# Altium PCB 如意硬件采集模块0831.PcbDoc (part 1 of 3)
Units mm, origin at the board's own origin, x right, y up, seen from the top; angles counter-clockwise.
Board outline 146 x 59 mm, 2 copper layers (Top Layer, Bottom Layer); 262 components, 188 nets, 705 pads, 120 vias.
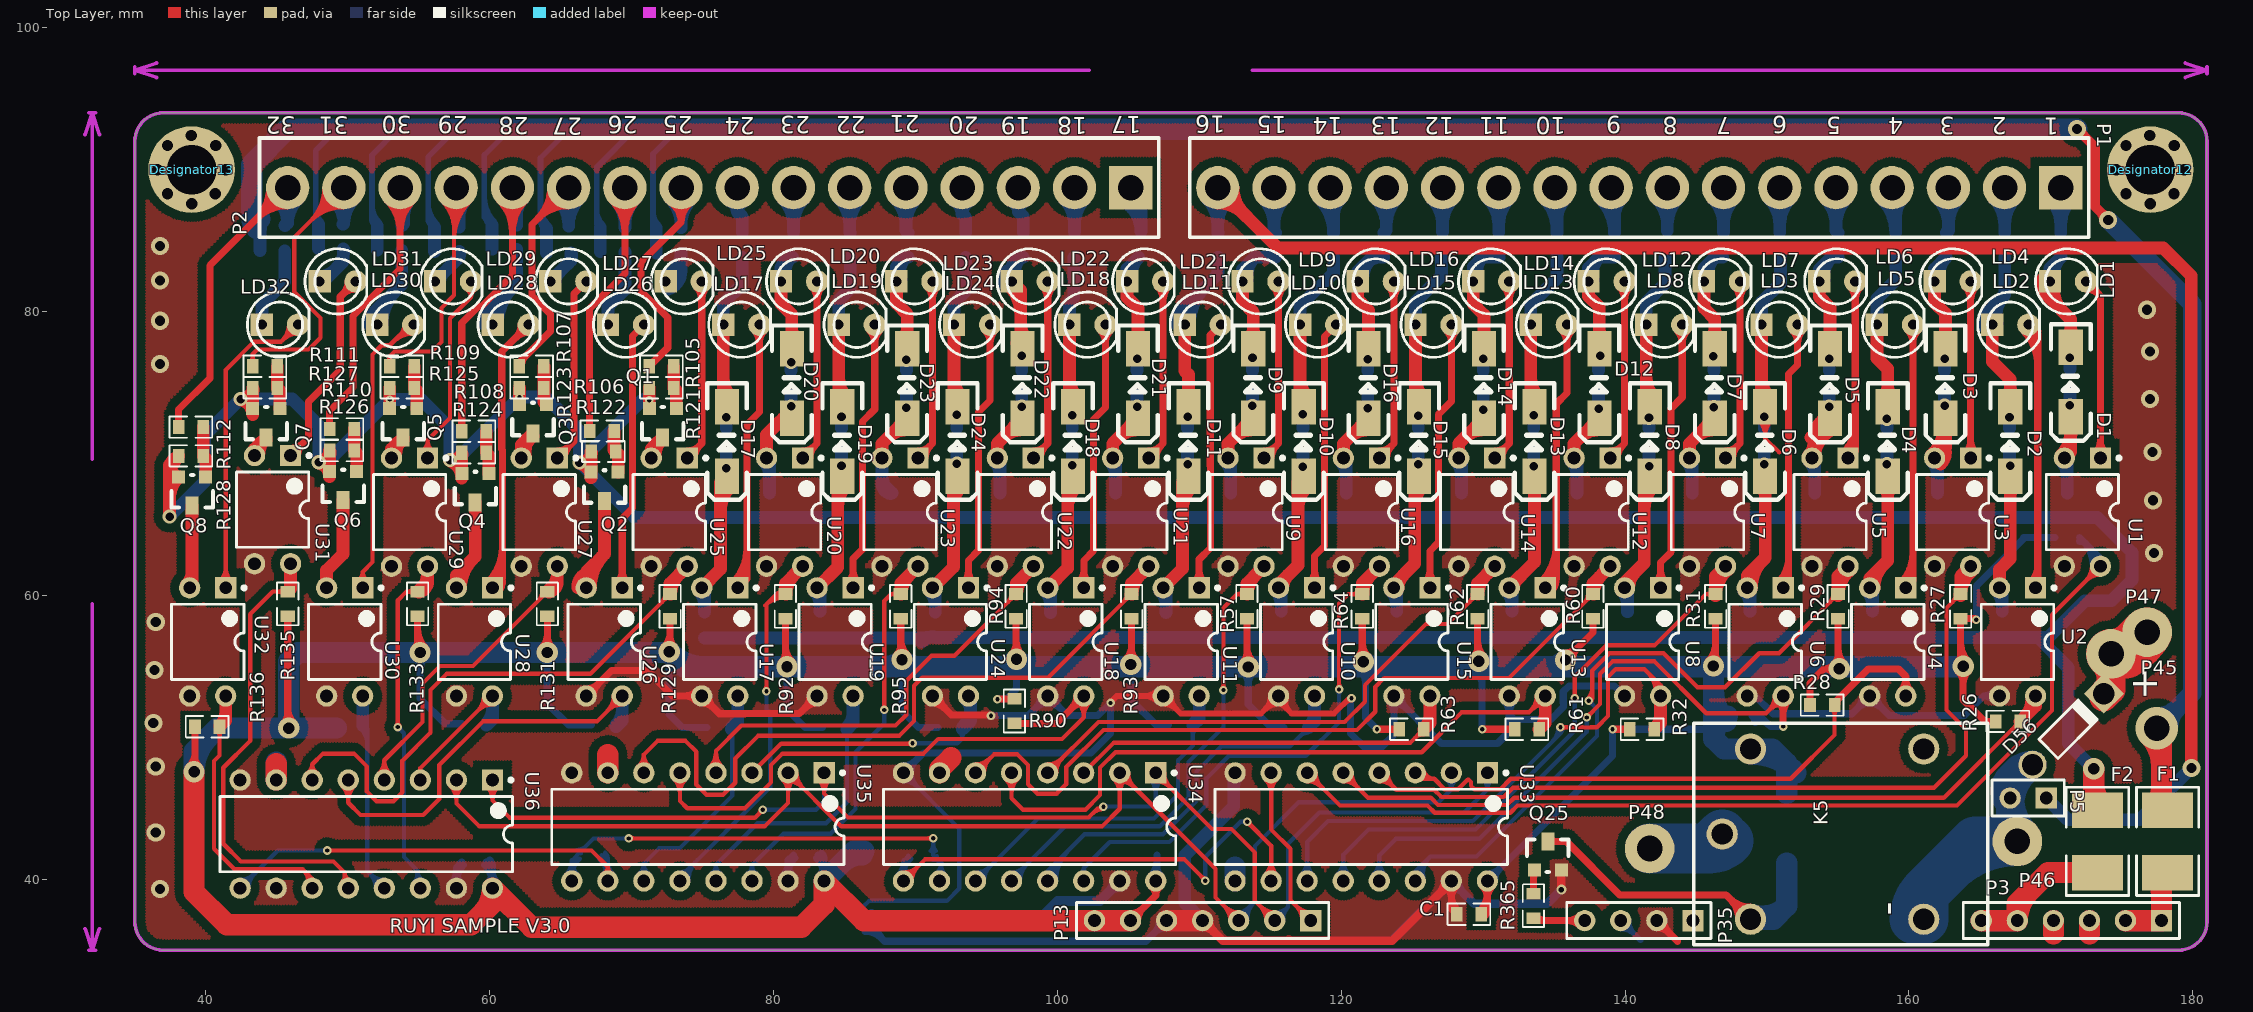
[diagram p0: Top Layer view]
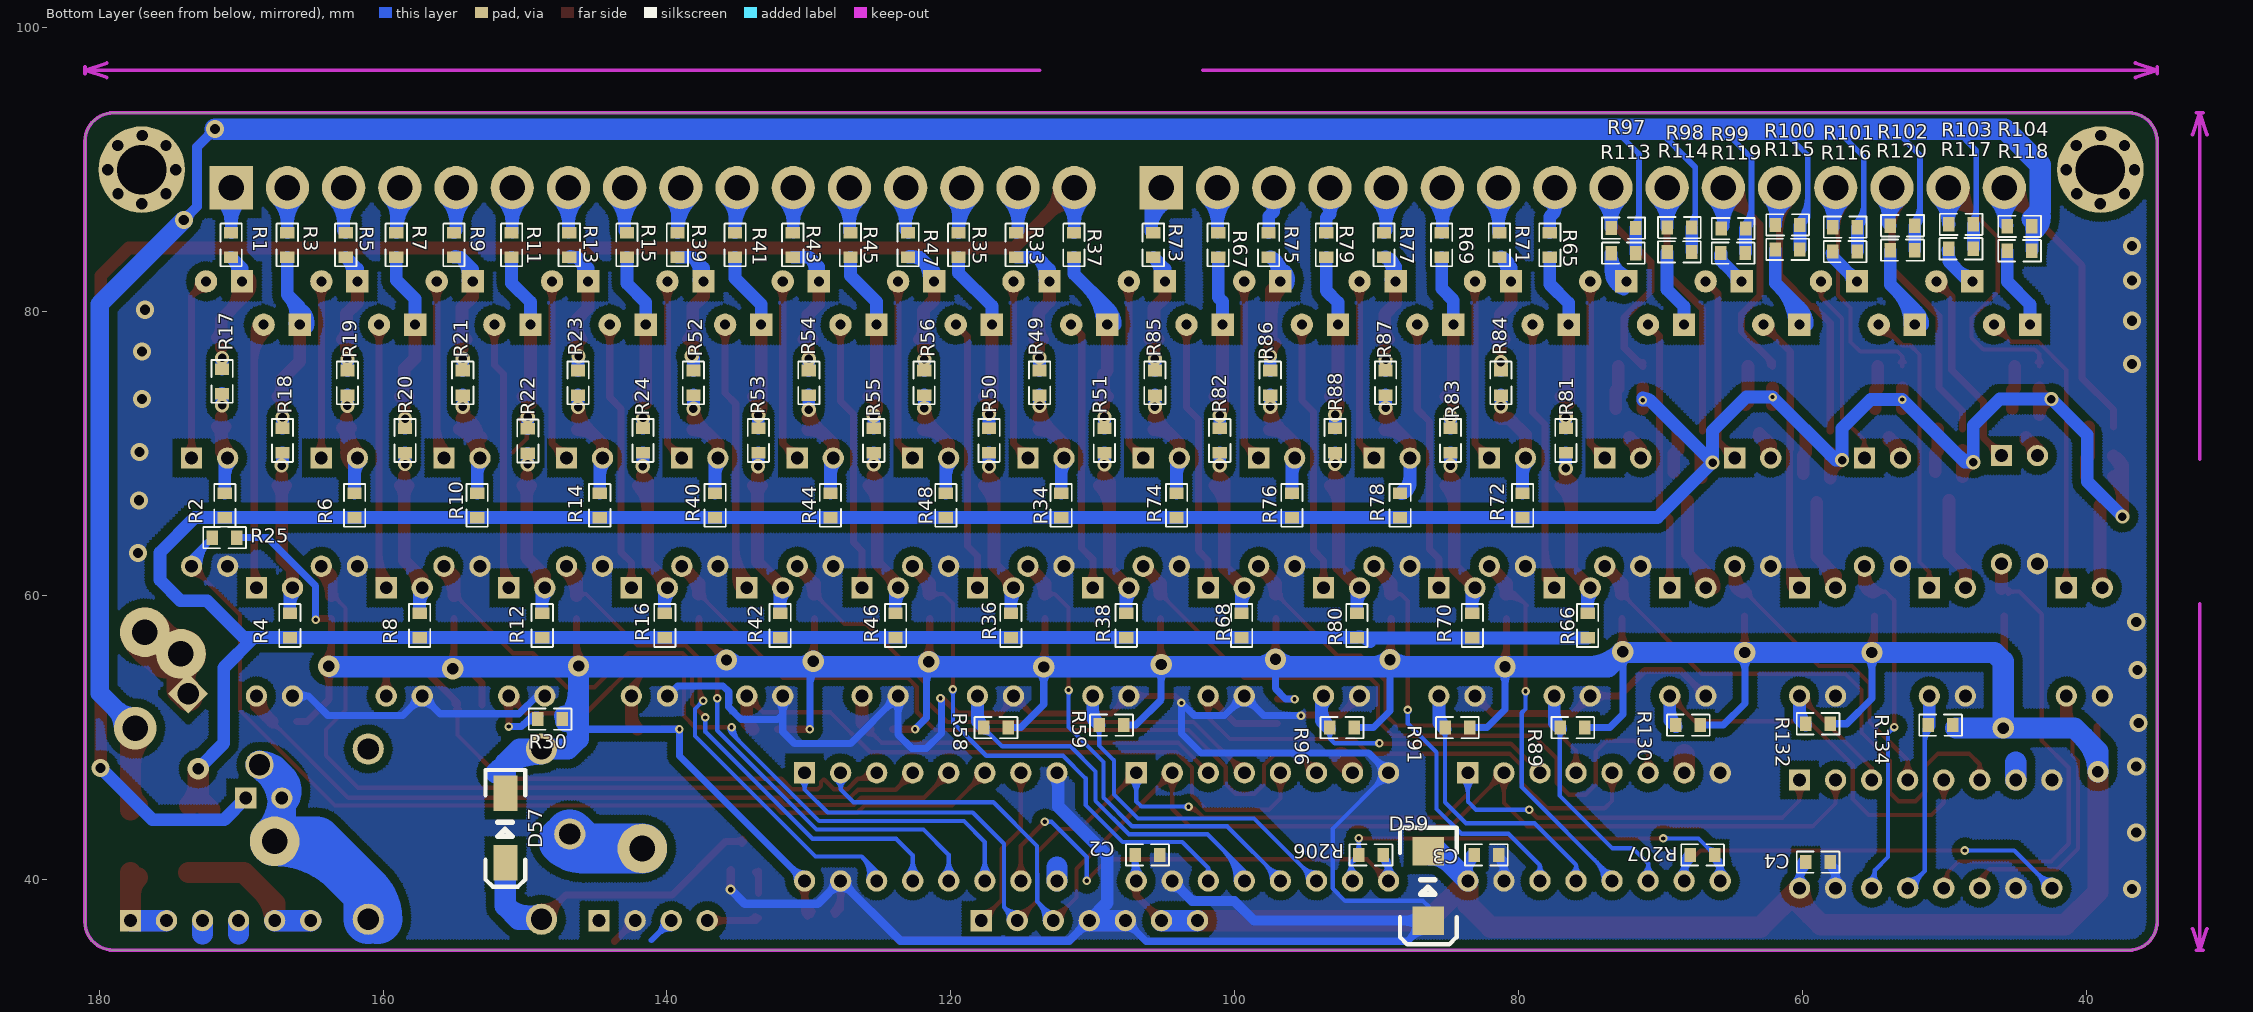
[diagram p1: Bottom Layer view, seen from below]

## Layer stack, top to bottom
Top Layer: signal copper 0.0356
Dielectric: dielectric 0.32, FR-4, Dk 4.8
Bottom Layer: signal copper 0.0356

## Board outline
35,37 35,92 cw(c37,92) 37,94 179,94 cw(c179,92) 181,92 181,37 cw(c179,37) 179,35 37,35 cw(c37,37)

## Design rules (kind name [scope] priority, off if disabled: settings)
Clearance Clearance_1 [InPolygon] p1: gap=0.6
Clearance [All] p2: gap=0.254
ComponentClearance [All] p1: gap=0 collisioncheckmode=3 verticalgap=0 showdistances=FALSE
FabricationTestpoint [(IsPad And (OnTopLayer Or OnBottomLayer))] p1: side=3 testpointundercomponent=TRUE minsize=1.016 maxsize=2.54 preferedsize=1.524 minholesize=0 maxholesize=1.016 preferedholesize=0.813 testpointgrid=0.025 allowsidetop=TRUE allowsidebottom=TRUE usegrid=TRUE gridtolerance=0
PolygonConnect PolygonConnect_1 [IsVia Or IsSMTPin Or IsThruPin vs IsPoly] p1: connectstyle=Direct reliefconductorwidth=0.254 reliefentries=4 polygonreliefangle="90 Angle"
PolygonConnect [All] p2: connectstyle=Relief reliefconductorwidth=0.254 reliefentries=4 polygonreliefangle="90 Angle"
RoutingVias [All] p1: holewidth=0.711 width=1.27 viastyle="Through Hole" minholewidth=0.25 minwidth=0.5 maxholewidth=1 maxwidth=2
SilkToSilkClearance [All] p1: silktosilkclearance=0
SilkscreenOverComponentPads [All] p1: minsilkscreentomaskgap=0
SolderMaskExpansion [All] p1: expansion=0.102
Width [All] p1: maxlimit=3.5 minlimit=0.3 preferedwidth=0.5
24 further rules are at their usual default settings.

## Components (designator, comment, footprint, x,y, rotation, side; value= is the part's Value field where it differs from the comment)
C1 "0.1uf" 0603C-1 129.032,37.592 r0 top
C2 "0.1uf" 0603C-1 106.172,41.656 r0 bottom
C3 "0.1uf" 0603C-1 82.296,41.656 r0 bottom
C4 "0.1uf" 0603C-1 58.928,41.148 r0 bottom
D1 "IN5819" DIODETP-5 171.402,72.57 r270 top
D2 "IN5819" DIODETP-5 167.144,68.405 r270 top
D3 "IN5819" DIODETP-5 162.572,72.469 r270 top
D4 "IN5819" DIODETP-5 158.508,68.405 r270 top
D5 "IN5819" DIODETP-5 154.444,72.469 r270 top
D6 "IN5819" DIODETP-5 149.872,68.405 r270 top
D7 "IN5819" DIODETP-5 146.316,72.469 r270 top
D8 "IN5819" DIODETP-5 141.744,68.405 r270 top
D9 "IN5819" DIODETP-5 113.804,72.469 r270 top
D10 "IN5819" DIODETP-5 117.36,68.405 r270 top
D11 "IN5819" DIODETP-5 109.232,68.405 r270 top
D12 "IN5819" DIODETP-5 138.188,72.469 r270 top
D13 "IN5819" DIODETP-5 133.616,68.405 r270 top
D14 "IN5819" DIODETP-5 130.06,72.469 r270 top
D15 "IN5819" DIODETP-5 125.488,68.405 r270 top
D16 "IN5819" DIODETP-5 121.932,72.469 r270 top
D17 "IN5819" DIODETP-5 76.72,68.405 r270 top
D18 "IN5819" DIODETP-5 101.104,68.405 r270 top
D19 "IN5819" DIODETP-5 84.848,68.405 r270 top
D20 "IN5819" DIODETP-5 81.292,72.469 r270 top
D21 "IN5819" DIODETP-5 105.676,72.469 r270 top
D22 "IN5819" DIODETP-5 97.548,72.469 r270 top
D23 "IN5819" DIODETP-5 89.42,72.469 r270 top
D24 "IN5819" DIODETP-5 92.976,68.405 r270 top
D56 "IN5048" DIODE-AXL 171.221,50.567 r45 top
D57 "IN5819" DIODETP-5 151.384,41.148 r270 bottom
D59 "SMAJ5A" SMB 86.36,37.084 r270 bottom
Designator12 "Comment" Hole-3MM 177,90 r0 top
Designator13 "Comment" Hole-3MM 39,90 r0 top
F1 "" 1812 178.225,42.672 r270 top
F2 "" 1812 173.287,42.672 r270 top
K5 "Relay-5" RELAYJL 146.845,43.18 r0 top
LD1 "LED" LED_Z1 171.208,82.121 r180 top
LD2 "LED" LED_Z1 167.144,79.073 r180 top
LD3 "LED" LED_Z1 150.888,79.073 r180 top
LD4 "LED" LED_Z1 163.08,82.121 r180 top
LD5 "LED" LED_Z1 159.016,79.073 r180 top
LD6 "LED" LED_Z1 154.952,82.121 r180 top
LD7 "LED" LED_Z1 146.824,82.121 r180 top
LD8 "LED" LED_Z1 142.76,79.073 r180 top
LD9 "LED" LED_Z1 114.312,82.121 r180 top
LD10 "LED" LED_Z1 118.376,79.073 r180 top
LD11 "LED" LED_Z1 110.248,79.073 r180 top
LD12 "LED" LED_Z1 138.696,82.121 r180 top
LD13 "LED" LED_Z1 134.632,79.073 r180 top
LD14 "LED" LED_Z1 130.568,82.121 r180 top
LD15 "LED" LED_Z1 126.504,79.073 r180 top
LD16 "LED" LED_Z1 122.44,82.121 r180 top
LD17 "LED" LED_Z1 77.736,79.073 r180 top
LD18 "LED" LED_Z1 102.12,79.073 r180 top
LD19 "LED" LED_Z1 85.864,79.073 r180 top
LD20 "LED" LED_Z1 81.8,82.121 r180 top
LD21 "LED" LED_Z1 106.184,82.121 r180 top
LD22 "LED" LED_Z1 98.056,82.121 r180 top
LD23 "LED" LED_Z1 89.928,82.121 r180 top
LD24 "LED" LED_Z1 93.992,79.073 r180 top
LD25 "LED" LED_Z1 73.672,82.121 r180 top
LD26 "LED" LED_Z1 69.608,79.073 r180 top
LD27 "LED" LED_Z1 65.544,82.121 r180 top
LD28 "LED" LED_Z1 61.48,79.073 r180 top
LD29 "LED" LED_Z1 57.416,82.121 r180 top
LD30 "LED" LED_Z1 53.352,79.073 r180 top
LD31 "LED" LED_Z1 49.288,82.121 r180 top
LD32 "LED" LED_Z1 45.224,79.073 r180 top
P1 "Header 16" KF3.96-16P 170.7,88.725 r180 top
P2 "Header 16" KF3.96-16P 105.168,88.725 r180 top
P3 "Header 6" HDR1X6 177.8,37.084 r180 top
P5 "Header 2" HDR2X1_A 169.672,45.72 r180 top
P13 "Header 7" HDR1X7 117.856,37.084 r180 top
P35 "Header 4" HDR1X4 144.78,37.084 r180 top
P45 "ONE" ONE 174.244,55.88 r0 top
P46 "ONE" ONE 167.64,42.672 r0 top
P47 "ONE" ONE 176.784,57.404 r0 top
P48 "ONE" ONE 141.732,42.164 r0 top
Q1 "AO3400" SOT23-JFET 73.152,73.152 r270 top
Q2 "AO3400" SOT23-JFET 69.056,68.679 r270 top
Q3 "AO3400" SOT23-JFET 64.008,73.435 r270 top
Q4 "AO3400" SOT23-JFET 59.944,68.58 r270 top
Q5 "AO3400" SOT23-JFET 54.864,73.152 r270 top
Q6 "AO3400" SOT23-JFET 50.634,68.736 r270 top
Q7 "AO3400" SOT23-JFET 45.212,73.152 r270 top
Q8 "AO3400" SOT23-JFET 39.995,68.356 r270 top
Q25 "9013" SOT23-BCE 133.604,40.64 r0 top
R1 "2K" 0603R-1 170.65,84.661 r270 bottom
R2 "2K" 0603R-1 171.208,66.373 r90 bottom
R3 "2K" 0603R-1 166.694,84.661 r270 bottom
R4 "2K" 0603R-1 166.624,57.912 r90 bottom
R5 "2K" 0603R-1 162.572,84.661 r270 bottom
R6 "2K" 0603R-1 162.064,66.373 r90 bottom
R7 "2K" 0603R-1 159.016,84.661 r270 bottom
R8 "2K" 0603R-1 157.48,57.912 r90 bottom
R9 "2K" 0603R-1 154.952,84.661 r270 bottom
R10 "2K" 0603R-1 153.428,66.373 r90 bottom
R11 "2K" 0603R-1 150.888,84.661 r270 bottom
R12 "2K" 0603R-1 148.844,57.912 r90 bottom
R13 "2K" 0603R-1 146.824,84.661 r270 bottom
R14 "2K" 0603R-1 144.792,66.373 r90 bottom
R15 "2K" 0603R-1 142.76,84.661 r270 bottom
R16 "2K" 0603R-1 140.208,57.912 r90 bottom
R17 "1K" 0603R-1 171.402,75.11 r90 bottom
R18 "1K" 0603R-1 167.144,70.945 r90 bottom
R19 "1K" 0603R-1 162.572,75.009 r90 bottom
R20 "1K" 0603R-1 158.508,70.945 r90 bottom
R21 "1K" 0603R-1 154.444,75.009 r90 bottom
R22 "1K" 0603R-1 149.86,70.912 r90 bottom
R23 "1K" 0603R-1 146.316,75.009 r90 bottom
R24 "1K" 0603R-1 141.744,70.945 r90 bottom
R25 "10K" 0603R-1 171.196,64.008 r0 bottom
R26 "10K" 0603R-1 166.999,51.175 r0 top
R27 "10K" 0603R-1 163.588,59.261 r90 top
R28 "10K" 0603R-1 153.924,52.324 r0 top
R29 "10K" 0603R-1 154.952,59.261 r90 top
R30 "10K" 0603R-1 148.261,51.225 r0 bottom
R31 "10K" 0603R-1 146.316,59.261 r90 top
R32 "10K" 0603R-1 141.236,50.625 r0 top
R33 "2K" 0603R-1 115.328,84.661 r270 bottom
R34 "2K" 0603R-1 112.28,66.373 r90 bottom
R35 "2K" 0603R-1 119.392,84.661 r270 bottom
R36 "2K" 0603R-1 115.824,57.912 r90 bottom
R37 "2K" 0603R-1 111.264,84.661 r270 bottom
R38 "2K" 0603R-1 107.696,57.912 r90 bottom
R39 "2K" 0603R-1 139.204,84.661 r270 bottom
R40 "2K" 0603R-1 136.664,66.373 r90 bottom
R41 "2K" 0603R-1 135.14,84.661 r270 bottom
R42 "2K" 0603R-1 132.08,57.912 r90 bottom
R43 "2K" 0603R-1 131.076,84.661 r270 bottom
R44 "2K" 0603R-1 128.536,66.373 r90 bottom
R45 "2K" 0603R-1 127.012,84.661 r270 bottom
R46 "2K" 0603R-1 123.952,57.912 r90 bottom
R47 "2K" 0603R-1 122.948,84.661 r270 bottom
R48 "2K" 0603R-1 120.408,66.373 r90 bottom
R49 "1K" 0603R-1 113.804,75.009 r90 bottom
R50 "1K" 0603R-1 117.36,70.945 r90 bottom
R51 "1K" 0603R-1 109.232,70.945 r90 bottom
R52 "1K" 0603R-1 138.188,75.009 r90 bottom
R53 "1K" 0603R-1 133.616,70.945 r90 bottom
R54 "1K" 0603R-1 130.06,75.009 r90 bottom
R55 "1K" 0603R-1 125.488,70.945 r90 bottom
R56 "1K" 0603R-1 121.932,75.009 r90 bottom
R57 "10K" 0603R-1 113.296,59.261 r90 top
R58 "10K" 0603R-1 116.852,50.625 r0 bottom
R59 "10K" 0603R-1 108.712,50.8 r0 bottom
R60 "10K" 0603R-1 137.68,59.261 r90 top
R61 "10K" 0603R-1 133.108,50.625 r0 top
R62 "10K" 0603R-1 129.552,59.261 r90 top
R63 "10K" 0603R-1 124.98,50.625 r0 top
R64 "10K" 0603R-1 121.424,59.261 r90 top
R65 "2K" 0603R-1 77.736,84.661 r270 bottom
R66 "2K" 0603R-1 75.184,57.912 r90 bottom
R67 "2K" 0603R-1 101.104,84.661 r270 bottom
R68 "2K" 0603R-1 99.568,57.912 r90 bottom
R69 "2K" 0603R-1 85.356,84.661 r270 bottom
R70 "2K" 0603R-1 83.312,57.912 r90 bottom
R71 "2K" 0603R-1 81.292,84.661 r270 bottom
R72 "2K" 0603R-1 79.768,66.373 r90 bottom
R73 "2K" 0603R-1 105.676,84.661 r270 bottom
R74 "2K" 0603R-1 104.152,66.373 r90 bottom
R75 "2K" 0603R-1 97.548,84.661 r270 bottom
R76 "2K" 0603R-1 96.024,66.373 r90 bottom
R77 "2K" 0603R-1 89.42,84.661 r270 bottom
R78 "2K" 0603R-1 88.404,66.373 r90 bottom
R79 "2K" 0603R-1 93.484,84.661 r270 bottom
R80 "2K" 0603R-1 91.44,57.912 r90 bottom
R81 "1K" 0603R-1 76.72,70.945 r90 bottom
R82 "1K" 0603R-1 101.104,70.945 r90 bottom
R83 "1K" 0603R-1 84.848,70.945 r90 bottom
R84 "1K" 0603R-1 81.292,75.009 r90 bottom
R85 "1K" 0603R-1 105.676,75.009 r90 bottom
R86 "1K" 0603R-1 97.548,75.009 r90 bottom
R87 "1K" 0603R-1 89.42,75.009 r90 bottom
R88 "1K" 0603R-1 92.976,70.945 r90 bottom
R89 "10K" 0603R-1 76.212,50.625 r0 bottom
R90 "10K" 0603R-1 97.028,51.816 r270 top
R91 "10K" 0603R-1 84.34,50.625 r0 bottom
R92 "10K" 0603R-1 80.784,59.261 r90 top
R93 "10K" 0603R-1 105.168,59.261 r90 top
R94 "10K" 0603R-1 97.04,59.261 r90 top
R95 "10K" 0603R-1 88.912,59.261 r90 top
R96 "10K" 0603R-1 92.468,50.625 r0 bottom
R97 "30K" 0603R-1 72.569,85.935 r180 bottom
R98 "30K" 0603R-1 68.63,85.975 r180 bottom
R99 "30K" 0603R-1 64.835,85.9 r180 bottom
R100 "30K" 0603R-1 61.007,86.158 r180 bottom
R101 "30K" 0603R-1 56.956,86 r180 bottom
R102 "30K" 0603R-1 52.909,86.1 r180 bottom
R103 "30K" 0603R-1 48.782,86.203 r180 bottom
R104 "30K" 0603R-1 44.658,86.062 r180 bottom
R105 "60K" 0603R-1 72.136,76.2 r0 top
R106 "60K" 0603R-1 67.934,71.63 r0 top
R107 "60K" 0603R-1 62.992,76.2 r0 top
R108 "60K" 0603R-1 58.928,71.628 r0 top
R109 "60K" 0603R-1 53.848,76.2 r0 top
R110 "60K" 0603R-1 49.618,71.784 r0 top
R111 "60K" 0603R-1 44.196,76.2 r0 top
R112 "60K" 0603R-1 38.979,71.912 r0 top
R113 "5K" 0603R-1 72.644,84.053 r0 bottom
R114 "5K" 0603R-1 68.699,84.14 r0 bottom
R115 "5K" 0603R-1 61.076,84.323 r0 bottom
R116 "5K" 0603R-1 57.025,84.165 r0 bottom
R117 "5K" 0603R-1 48.857,84.368 r0 bottom
R118 "5K" 0603R-1 44.726,84.227 r0 bottom
R119 "5K" 0603R-1 64.904,84.065 r0 bottom
R120 "5K" 0603R-1 52.978,84.265 r0 bottom
R121 "30K" 0603R-1 72.136,74.676 r0 top
R122 "30K" 0603R-1 68.04,70.203 r0 top
R123 "30K" 0603R-1 62.992,74.676 r0 top
R124 "30K" 0603R-1 58.928,70.104 r0 top
R125 "30K" 0603R-1 53.848,74.676 r0 top
R126 "30K" 0603R-1 49.618,70.26 r0 top
R127 "30K" 0603R-1 44.196,74.676 r0 top
R128 "30K" 0603R-1 38.979,69.88 r0 top
R129 "10K" 0603R-1 72.656,59.261 r90 top
R130 "10K" 0603R-1 68.072,50.8 r0 bottom
R131 "10K" 0603R-1 64.008,59.436 r90 top
R132 "10K" 0603R-1 58.928,50.9 r0 bottom
R133 "10K" 0603R-1 54.864,59.436 r90 top
R134 "10K" 0603R-1 50.292,50.8 r0 bottom
R135 "10K" 0603R-1 45.72,59.436 r90 top
R136 "10K" 0603R-1 40.132,50.8 r0 top
R206 "0" 0603R-1 90.424,41.656 r0 bottom
R207 "0" 0603R-1 67.056,41.656 r0 bottom
R365 "3K" 0603R-1 133.604,38.1 r270 top
U1 "TIP521" DIP-4 172.224,65.865 r270 top
U2 "TIP521" DIP-4 167.652,56.721 r270 top
U3 "TIP521" DIP-4 163.08,65.865 r270 top
U4 "TIP521" DIP-4 158.508,56.721 r270 top
U5 "TIP521" DIP-4 154.444,65.865 r270 top
U6 "TIP521" DIP-4 149.872,56.721 r270 top
U7 "TIP521" DIP-4 145.808,65.865 r270 top
U8 "TIP521" DIP-4 141.236,56.721 r270 top
U9 "TIP521" DIP-4 113.296,65.865 r270 top
U10 "TIP521" DIP-4 116.852,56.721 r270 top
U11 "TIP521" DIP-4 108.724,56.721 r270 top
U12 "TIP521" DIP-4 137.68,65.865 r270 top
U13 "TIP521" DIP-4 133.108,56.721 r270 top
U14 "TIP521" DIP-4 129.552,65.865 r270 top
U15 "TIP521" DIP-4 124.98,56.721 r270 top
U16 "TIP521" DIP-4 121.424,65.865 r270 top
U17 "TIP521" DIP-4 76.212,56.721 r270 top
U18 "TIP521" DIP-4 100.596,56.721 r270 top
U19 "TIP521" DIP-4 84.34,56.721 r270 top
U20 "TIP521" DIP-4 80.784,65.865 r270 top
U21 "TIP521" DIP-4 105.168,65.865 r270 top
U22 "TIP521" DIP-4 97.04,65.865 r270 top
U23 "TIP521" DIP-4 88.912,65.865 r270 top
U24 "TIP521" DIP-4 92.468,56.721 r270 top
U25 "TIP521" DIP-4 72.656,65.865 r270 top
U26 "TIP521" DIP-4 68.072,56.721 r270 top
U27 "TIP521" DIP-4 63.5,65.865 r270 top
U28 "TIP521" DIP-4 58.928,56.721 r270 top
U29 "TIP521" DIP-4 54.356,65.865 r270 top
U30 "TIP521" DIP-4 49.784,56.721 r270 top
U31 "TIP521" DIP-4 44.704,66.04 r270 top
U32 "TIP521" DIP-4 40.132,56.721 r270 top
U33 "74HC165" DIP-16 121.412,43.688 r270 top
U34 "74HC165" DIP-16 98.044,43.688 r270 top
U35 "74HC165" DIP-16 74.676,43.688 r270 top
U36 "74HC165" DIP-16 51.308,43.18 r270 top

## Footprints (in the part's own frame and the unit in brackets; to place one, negate y for a bottom-side part, rotate by r counter-clockwise, add the part's x,y. Pads: shape width x height; smd on the part's side, far side on the other; paste and mask are expansions set on the pad)
0603C-1 [mm]
  rect 0.813x1 smd: 1(-0.892,-0.057) 2(0.835,-0.057)
  silkscreen extent -1.54,-0.81 1.47,0.69
0603R-1 [mm]
  rect 0.813x1 smd: 1(-0.892,-0.057) 2(0.835,-0.057)
  silkscreen extent -1.54,-0.81 1.47,0.69
1812 [mm] "保险丝"
  rect 2.5x3.6 smd: 1(-2.2,0) 2(2.2,0)
  silkscreen extent -3.81,-2.2 3.81,2.2, body extent -2.54,-1.65 2.67,1.65, height 1.2
DIODE-AXL [mm] "直插二极管"
  round 2 hole 1.5: 1(-3.55,0)
  rect 2x2 hole 1.5: 2(3.55,0)
  silkscreen extent -1.95,-0.95 2.05,0.95
DIODETP-5 [mm]
  rect 2.5x1.702 smd: 1(0,0) 2(-4.9,0)
  silkscreen extent -6.54,-1.39 1.67,1.4
DIP-4 [mm] "DIP; 4 Leads; Row Spacing 7.62 mm; Pitch 2.54 mm"
  rect 1.5x1.5 hole 0.9: 1(-3.81,1.27)
  round 1.5 hole 0.9: 2(-3.81,-1.27) 3(3.81,-1.27) 4(3.81,1.27)
  silkscreen extent -3.93,-2.55 2.65,2.7, body extent -3.15,-2.5 3.15,2.5, height 5.6
DIP-16 [mm] "DIP; 16 Leads; Row Spacing 7.62 mm; Pitch 2.54 mm"
  rect 1.5x1.5 hole 0.9: 1(-3.81,8.89)
  round 1.5 hole 0.9: 2(-3.81,6.35) 3(-3.81,3.81) 4(-3.81,1.27) 5(-3.81,-1.27) 6(-3.81,-3.81) 7(-3.81,-6.35) 8(-3.81,-8.89) 9(3.81,-8.89) 10(3.81,-6.35) 11(3.81,-3.81) 12(3.81,-1.27) 13(3.81,1.27) 14(3.81,3.81) 15(3.81,6.35) 16(3.81,8.89)
  silkscreen extent -3.93,-10.3 2.65,10.32, body extent -3.6,-10.28 3.6,10.28, height 5.08
HDR1X4 [mm] "Connector; Header; 4 Position"
  rect 1.5x1.5 hole 0.9: 1(0,0)
  round 1.5 hole 0.9: 2(2.54,0) 3(5.08,0) 4(7.62,0)
  silkscreen extent -1.27,-1.27 8.89,1.27
HDR1X6 [mm] "Connector; Header; 6 Position"
  rect 1.5x1.5 hole 0.9: 1(0,0)
  round 1.5 hole 0.9: 2(2.54,0) 3(5.08,0) 4(7.62,0) 5(10.16,0) 6(12.7,0)
  silkscreen extent -1.27,-1.27 13.97,1.27
HDR1X7 [mm] "Connector; Header; 7 Position"
  rect 1.5x1.5 hole 0.9: 1(0,0)
  round 1.5 hole 0.9: 2(2.54,0) 3(5.08,0) 4(7.62,0) 5(10.16,0) 6(12.7,0) 7(15.24,0)
  silkscreen extent -1.27,-1.27 16.51,1.27
HDR2X1_A [mm] "Connector; Header; 2 Position"
  rect 1.5x1.5 hole 0.9: 1(0,0)
  round 1.5 hole 0.9: 2(2.54,0)
  silkscreen extent -1.27,-1.27 3.81,1.27
Hole-3MM [mm]
  round 6.1 hole 3.5: 0(0,0)
  round 1 hole 0.8: 2(-2.4,0) 3(-0.025,2.4) 4(2.4,0) 5(0,-2.4) 6(-1.7,1.7) 7(1.7,1.7) 8(1.675,-1.7) 9(-1.7,-1.7)
KF3.96-16P [mil]
  rect 120x120 hole 70.87: 1(0,0)
  round 120 hole 70.87: 2(155.91,0) 3(311.81,0) 4(467.72,0) 5(623.62,0) 6(779.53,0) 7(935.43,0) 8(1091.34,0) 9(1247.24,0) 10(1403.15,0) 11(1559.06,0) 12(1714.96,0) 13(1870.87,0) 14(2026.77,0) 15(2182.68,0) 16(2338.58,0)
  silkscreen extent -78,-138 2417,138
LED_Z1 [mil] "直径3MM二极管"
  rect 62x62 hole 28: 1(50,0)
  round 62 hole 28: 2(-50,0)
  silkscreen extent -81,-91 90,91
ONE [mm]
  round 3.5 hole 1.8: 1(0,0)
RELAYJL [mm]
  round 2.2 hole 1.5: 1(2,6) 2(2,-6) 3(0,0) 4(14.2,-6) 5(14.2,6)
  silkscreen extent -2.01,-7.8 18.71,7.8
SMB [mm]
  rect 2x2.2 smd: 1(0,0) 2(-4.9,0)
  silkscreen extent -6.54,-1.99 1.67,2
SOT23-BCE [mil]
  rect 36x36 smd: B(0,0) E(75,0)
  rect 36x50 smd: C(38,80)
  silkscreen extent -20,-5 95,85
SOT23-JFET [mil]
  rect 36x36 smd: 1(0,0) 3(0,-75)
  rect 50x36 smd: 2(80,-38)
  silkscreen extent -5,-95 85,20

## Part data
C1 C2 C3 C4: library part CAP, "Capacitor"
D1 D2 D3 D4 D5 D6 D7 D8 D9 D10 D11 D12 D13 D14 D15 D16 D17 D18 D19 D20 D21 D22 D23 D24 D56 D57: library part DIODE, "Diode"
D59: library part TVS
F1 F2: library part FUSE1, "Fuse"
P1 P2: "Header16贴片"
P3: "Header, 6-Pin"
P5: "接插件"
P13: "Header, 7-Pin"
P35: "Header, 4-Pin"
Q1 Q2 Q3 Q4 Q5 Q6 Q7 Q8: library part "MOSFET N"
Q25: library part NPN
R1 R2 R3 R4 R5 R6 R7 R8 R9 R10 R11 R12 R13 R14 R15 R16 R17 R18 R19 R20 R21 R22 R23 R24 R25 R26 R27 R28 R29 R30 R31 R32 R33 R34 R35 R36 R37 R38 R39 R40 R41 R42 R43 R44 R45 R46 R47 R48 R49 R50 R51 R52 R53 R54 R55 R56 R57 R58 R59 R60 R61 R62 R63 R64 R65 R66 R67 R68 R69 R70 R71 R72 R73 R74 R75 R76 R77 R78 R79 R80 R81 R82 R83 R84 R85 R86 R87 R88 R89 R90 R91 R92 R93 R94 R95 R96 R97 R98 R99 R100 R101 R102 R103 R104 R113 R114 R115 R116 R117 R118 R119 R120 R129 R130 R131 R132 R133 R134 R135 R136 R206 R207: library part RES2
R105 R106 R107 R108 R109 R110 R111 R112 R121 R122 R123 R124 R125 R126 R127 R128 R365: library part RES-2
U1 U2 U3 U4 U5 U6 U7 U8 U9 U10 U11 U12 U13 U14 U15 U16 U17 U18 U19 U20 U21 U22 U23 U24 U25 U26 U27 U28 U29 U30 U31 U32: library part OPTOISO1, "Optoisolator"
U33 U34 U35 U36: "8并口输入，串口输出"

## Via types
v1: diameter 1, hole 0.6, Top Layer to Bottom Layer, 53 vias
v2: diameter 0.6, hole 0.3, Top Layer to Bottom Layer, 29 vias
v3: diameter 1.27, hole 0.711, Top Layer to Bottom Layer, 19 vias
v4: diameter 1.5, hole 0.8, Top Layer to Bottom Layer, 17 vias
v5: diameter 3, hole 1.8, Top Layer to Bottom Layer, 1 vias
v6: diameter 0.7, hole 0.4, Top Layer to Bottom Layer, 1 vias

## Nets (pads, with @x,y where several pads share a name; then routed paths per layer and width w, separated by ;. In a path a pad name is that pad's centre, name@x,y a point inside that pad or via, vN(x,y) a via of type N, cw(c..) or ccw(c..) an arc to the next point about the centre after c; other vN are vias at no path point)
165_CLK: P13.2 U33.1 U34.1 U35.1 U36.1 | length 113.8
  Top Layer w0.3: U36.1@59.776,46.564 cw(c58.775,45.552) 60.198,45.552 ; U36.1@60.198,46.99 60.198,45.552 ; U36.1@60.62,46.564 ccw(c61.621,45.552) 60.198,45.552 ; v2@79.1,44.9 cw(c78.738,44.9) 78.994,44.644 cw(c79.25,44.388) v2@79.25,44.75 ; v2(79.25,44.9) 78.675,44.325 61.425,44.325 60.198,45.552 ; U35.1@83.142,47.074 cw(c82.117,46.049) 83.566,46.049 cw(c85.015,46.049) U35.1@83.99,47.074 ; U35.1@83.566,47.498 83.566,46.034 85.254,44.346 102.204,44.346 102.833,44.975 ; 102.496,44.638 cw(c103.25,43.884) v2@103.25,44.95 ; 102.688,44.829 cw(c103.052,44.465) v2@103.205,44.957 ; v2@103.112,45.159 cw(c102.833,45.278) 102.833,44.975 ; v2(103.25,45.1) 103.25,44.975 102.833,44.975 ; U34.1@106.934,46.898 cw(c106.934,45.449) 107.958,46.474 cw(c108.983,47.498) U34.1@107.534,47.498 ; U34.1@106.934,47.498 110.9,43.532 112.268,43.532 113.925,41.875 113.908,41.858 113.908,38.492 ; 113.925,38.475 P13.2@115.316,37.084 ; P13.2@114.716,37.084 ccw(c113.267,37.084) 114.292,38.108 ccw(c115.316,39.133) P13.2@115.316,37.684
  Bottom Layer w0.3: v2(79.25,44.9) 83,44.9 83.566,45.466 U35.1@83.566,47.498 ; v2@79.356,44.794 cw(c79.612,44.538) 79.612,44.9 cw(c79.612,45.262) v2@79.356,45.006 ; U35.1@83.142,47.074 cw(c82.117,46.049) 83.566,46.049 cw(c85.015,46.049) U35.1@83.99,47.074 ; v2@103.25,45.125 106.575,45.125 106.934,45.484 U34.1@106.934,47.498 ; v2@103.356,44.994 cw(c103.672,44.678) 103.672,45.125 ; v2@103.356,45.206 ccw(c103.552,45.402) 103.552,45.125 ; U34.1@106.51,47.074 cw(c105.485,46.049) 106.934,46.049 cw(c108.383,46.049) U34.1@107.358,47.074 ; P13.2@115.316,37.084 116.25,38.018 ; P13.2@115.356,37.683 ccw(c115.434,38.834) 116.25,38.018 ; P13.2@115.915,37.124 cw(c117.066,37.202) 116.25,38.018 ; U33.1@129.952,47.011 cw(c129.459,46.327) 130.302,46.327 ; U33.1@130.302,47.498 130.302,46.327 ; U33.1@130.652,47.011 ccw(c131.145,46.327) 130.302,46.327 ; 116.25,38.018 116.25,42.5 118.45,44.7 128.675,44.7 130.302,46.327
165_QH: P13.1 U33.7 | length 16.1
  Top Layer w0.3: U33.7@114.638,47.074 cw(c113.613,46.049) 115.062,46.049 cw(c116.511,46.049) U33.7@115.486,47.074 ; U33.7@115.062,47.498 115.062,43.513 116.425,42.15 116.425,38.515 P13.1@117.856,37.084 ; P13.1@117.256,37.084 ccw(c115.807,37.084) 116.832,38.108 ccw(c117.856,39.133) P13.1@117.856,37.684
165_SH/LD: P13.3 U33.2 U34.2 U35.2 U36.2 | length 111.7
  Top Layer w0.3: U36.2@57.234,46.566 cw(c56.209,45.541) 57.658,45.541 cw(c59.107,45.541) U36.2@58.082,46.566 ; U36.2@57.658,46.99 57.658,45.342 59.275,43.725 79.375,43.725 81.026,45.376 U35.2@81.026,47.498 ; U35.2@80.602,47.074 cw(c79.577,46.049) 81.026,46.049 cw(c82.475,46.049) U35.2@81.45,47.074 ; U35.2@81.026,46.898 cw(c81.026,45.507) 82.009,46.491 ; U35.2@81.026,47.474 84.775,43.725 103.15,43.725 104.394,44.969 U34.2@104.394,47.498 111.15,40.742 111.15,38.71 P13.3@112.776,37.084 ; U35.2@81.326,47.498 ccw(c82.108,47.498) 81.555,46.945 ; U35.2@81.626,47.498 ccw(c83.132,47.498) 82.067,46.433 ; U34.2@103.97,47.074 cw(c102.945,46.049) 104.394,46.049 cw(c105.843,46.049) U34.2@104.818,47.074 ; U34.2@104.394,46.898 cw(c104.394,45.449) 105.418,46.474 cw(c106.443,47.498) U34.2@104.994,47.498 ; P13.3@112.176,37.084 ccw(c110.727,37.084) 111.752,38.108 ccw(c112.776,39.133) P13.3@112.776,37.684
  Bottom Layer w0.3: P13.3@112.776,37.084 112.776,37.301 113.908,38.433 ; P13.3@112.776,37.684 ccw(c112.776,38.609) 113.43,37.955 ; P13.3@113.076,37.092 cw(c114.231,37.122) 113.414,37.939 ; P13.3@113.376,37.1 cw(c115.194,37.147) 113.908,38.433 ; U33.2@127.415,47.009 cw(c126.939,46.337) 127.762,46.337 ; U33.2@127.762,47.498 127.762,46.337 ; U33.2@128.109,47.009 ccw(c128.585,46.337) 127.762,46.337 ; 113.908,38.433 113.908,40.373 113.925,40.39 113.925,42.35 117,45.425 126.85,45.425 127.762,46.337
+3.3V: P35.1
+5V: C1.2 C2.2 C3.2 C4.2 D57.2 D59.2 K5.1 P13.6 P13.7 R25.1 R26.1 R27.1 R28.1 R29.1 R30.1 R31.1 R32.1 R57.1 R58.1 R59.1 R60.1 R61.1 R62.1 R63.1 R64.1 R89.1 R90.1 R91.1 R92.1 R93.1 R94.1 R95.1 R96.1 R129.1 R130.1 R131.1 R132.1 R133.1 R134.1 R135.1 R136.1 U33.16 U34.16 U35.16 U36.16 | length 510.3
  Top Layer w0.5: v4@38.821,47.929 ccw(c37.811,48.939) 39.24,48.939 ; v4@39.24,47.64 R136.1@39.24,50.743 ; 39.24,48.626 ccw(c40.226,48.626) v4@39.529,47.929 ; v4@45.496,51.004 ccw(c44.819,51.681) 45.777,51.681 ; v4@45.777,50.65 R135.1@45.777,58.544 ; 45.777,52.033 ccw(c47.233,52.033) v4@46.204,51.004 ; v4@54.746,56.329 ccw(c54.325,56.75) 54.921,56.75 ; v4@54.921,56.154 R133.1@54.921,58.544 ; 54.921,57.614 ccw(c56.739,57.614) v4@55.454,56.329 ; v4@63.696,56.329 ccw(c62.807,57.218) 64.065,57.218 ; v4@64.065,55.99 R131.1@64.065,58.544 ; 64.065,57.146 ccw(c65.221,57.146) v4@64.404,56.329 ; v4@72.296,56.379 ccw(c71.291,57.384) 72.713,57.384 ; v4@72.713,56.088 R129.1@72.713,58.369 ; 72.713,57.08 ccw(c73.705,57.08) v4@73.004,56.379 ; v4@80.596,55.329 ccw(c80.006,55.919) 80.841,55.919 ; v4@80.841,55.084 R92.1@80.841,58.369 ; 80.841,56.445 ccw(c82.42,56.445) v4@81.304,55.329 ; v4@88.696,55.829 ccw(c88.038,56.487) 88.969,56.487 ; v4@88.969,55.556 R95.1@88.969,58.369 ; 88.969,56.878 ccw(c90.453,56.878) v4@89.404,55.829 ; v2@95.808,52.708 R90.1@96.971,52.708 ; v4@96.771,55.854 ccw(c95.986,56.639) 97.097,56.639 ; v4@97.097,55.528 R94.1@97.097,58.369 ; 97.097,56.775 ccw(c98.4,56.775) v4@97.479,55.854 ; v4@104.821,55.479 ccw(c103.847,56.453) 105.225,56.453 ; P13.6@105.156,37.084 106.934,38.862 ; P13.6@105.156,37.584 ccw(c105.156,38.791) 106.01,37.938 ccw(c106.863,37.084) P13.6@105.656,37.084 ; v4@105.225,55.175 R93.1@105.225,58.369 ; 105.225,56.211 ccw(c106.261,56.211) v4@105.529,55.479 ; U34.16@106.629,39.482 cw(c106.152,38.862) 106.934,38.862 ; U34.16@106.934,39.878 106.934,38.862 ; U34.16@107.239,39.482 ccw(c107.716,38.862) 106.934,38.862 ; v4@113.096,55.304 ccw(c112.477,55.923) 113.353,55.923 ; v4@113.353,55.047 R57.1@113.353,58.369 ; 113.353,56.391 ccw(c114.891,56.391) v4@113.804,55.304 ; v4@121.196,55.679 ccw(c120.509,56.366) 121.481,56.366 ; v4@121.481,55.394 R64.1@121.481,58.369 ; 121.481,56.699 ccw(c122.924,56.699) v4@121.904,55.679 ; v2(122.518,50.568) R63.1@124.088,50.568 ; v4@129.346,55.704 ccw(c128.713,56.337) 129.609,56.337 ; v4@129.609,55.441 R62.1@129.609,58.369 ; 129.609,56.777 ccw(c131.127,56.777) v4@130.054,55.704 ; C1.2@129.756,37.739 ccw(c128.439,39.056) 130.302,39.056 ; C1.2@129.867,37.535 130.302,37.97 U33.16@130.302,39.878 ; C1.2@129.867,37.785 ccw(c129.867,38.389) 130.294,37.962 ; v2(129.932,50.568) R61.1@132.216,50.568 ; U33.16@129.948,39.524 cw(c129.095,38.671) 130.302,38.671 cw(c131.509,38.671) U33.16@130.656,39.524 ; C1.2@130.11,37.386 ccw(c129.646,37.849) 130.302,37.849 ; v4(135.8,55.45) 137.737,57.387 R60.1@137.737,58.369 ; v4@135.8,55.95 ccw(c135.8,57.157) 136.654,56.304 ccw(c137.507,55.45) v4@136.3,55.45 ; v2(139.118,50.568) R32.1@140.344,50.568 ; v4@145.871,55.379 ccw(c144.661,56.589) 146.373,56.589 ; v4@146.373,55.173 R31.1@146.373,58.369 ; 146.373,55.875 ccw(c147.075,55.875) v4@146.579,55.379 ; R28.1@153.032,52.267 153.032,53.832 154.025,54.825 ; v4@154.718,54.503 ccw(c154.025,53.919) 154.025,54.825 ; v4@154.718,55.147 cw(c154.025,55.731) 154.025,54.825 ; v4@154.746,55.179 ccw(c154.113,55.812) 155.009,55.812 ; 155.009,56.252 ccw(c156.527,56.252) v4@155.454,55.179 ; R29.1@155.009,58.369 v4@155.009,54.825 ; v4(155.1,54.825) v4@155.009,54.825 ; v4@163.471,54.646 cw(c162.618,53.793) 163.825,53.793 cw(c165.032,53.793) v4@164.179,54.646 ; v4@163.471,55.354 ccw(c163.052,55.773) 163.645,55.773 ; v4@163.645,55.18 R27.1@163.645,58.369 164.656,58.369 v2(164.75,58.275) ; 163.645,56.642 ccw(c165.467,56.642) v4@164.179,55.354 ; v4(163.825,55) 163.825,52.65 165.357,51.118 R26.1@166.107,51.118 ; 164.403,58.369 cw(c164.403,57.928) v2@164.715,58.24 ; 154.025,54.825 v4@155.009,54.825
  Top Layer w1.5: v4(39.175,47.575) 39.175,39.1 41.475,36.8 58.7,36.8 60.198,38.298 U36.16@60.198,39.37 ; 59.44,37.54 ccw(c57.61,39.37) U36.16@60.198,39.37 ; P13.6@105.156,37.084 86.36,37.084 U35.16@83.566,39.878 83.566,38.216 81.975,36.625 62.943,36.625 U36.16@60.198,39.37
  Bottom Layer w0.5: v4@54.746,55.621 cw(c53.893,54.768) 55.1,54.768 cw(c56.307,54.768) v4@55.454,55.621 ; v4(55.1,55.975) 55.1,52.725 56.868,50.957 R132.1@58.036,50.957 ; C4.2@59.652,41.001 cw(c58.335,39.684) U36.16@60.198,39.684 ; C4.2@59.763,41.205 60.198,40.77 U36.16@60.198,39.37 ; U36.16@59.844,39.724 ccw(c58.991,40.577) 60.198,40.577 ccw(c61.405,40.577) U36.16@60.552,39.724 ; C4.2@60.006,41.354 cw(c59.542,40.891) 60.198,40.891 ; v4@63.696,55.621 cw(c62.843,54.768) 64.05,54.768 cw(c65.257,54.768) v4@64.404,55.621 ; v4(64.05,55.975) 64.05,52.375 65.568,50.857 R130.1@67.18,50.857 ; v4@72.296,55.671 cw(c71.443,54.818) 72.65,54.818 cw(c73.857,54.818) v4@73.004,55.671 ; v4(72.65,56.025) 72.65,51.6 73.568,50.682 R89.1@75.32,50.682 ; v4@80.596,54.621 cw(c79.743,53.768) 80.95,53.768 cw(c82.157,53.768) v4@81.304,54.621 ; v4(80.95,54.975) 80.95,51.95 82.218,50.682 R91.1@83.448,50.682 ; C3.2@83.02,41.509 cw(c81.703,40.192) U35.16@83.566,40.192 ; C3.2@83.131,41.713 83.566,41.278 U35.16@83.566,39.878 ; U35.16@83.212,40.232 ccw(c82.359,41.085) 83.566,41.085 ccw(c84.773,41.085) U35.16@83.92,40.232 ; C3.2@83.374,41.862 cw(c82.91,41.399) 83.566,41.399 ; v4@88.696,55.121 cw(c87.843,54.268) 89.05,54.268 cw(c90.257,54.268) v4@89.404,55.121 ; v4@89.05,54.975 89.05,51.85 90.218,50.682 R96.1@91.576,50.682 ; v2@95.808,52.708 96.408,52.708 97.125,53.425 v4@97.125,54.975 ; v4@96.771,55.146 cw(c95.918,54.293) 97.125,54.293 cw(c98.332,54.293) v4@97.479,55.146 ; v4@104.821,54.771 cw(c103.968,53.918) 105.175,53.918 cw(c106.382,53.918) v4@105.529,54.771 ; v4@105.175,54.975 105.175,52.65 106.968,50.857 R59.1@107.82,50.857 ; U34.16@106.58,40.232 ccw(c105.551,41.261) C2.2@107.007,41.261 ; U34.16@106.934,39.878 107.007,39.951 C2.2@107.007,41.713 ; 107.007,40.909 ccw(c107.965,40.909) U34.16@107.288,40.232 ; v4@113.096,54.596 cw(c112.243,53.743) 113.45,53.743 cw(c114.657,53.743) v4@113.804,54.596 ; v4(113.45,54.95) 113.45,52.3 115.068,50.682 R58.1@115.96,50.682 ; v4@121.196,54.971 cw(c119.92,53.695) 121.725,53.695 ; 121.725,54.54 cw(c122.335,54.54) v4@121.904,54.971 ; v4@121.725,54.7 121.725,51.361 v2(122.518,50.568) ; v4@129.346,54.996 cw(c127.933,53.583) 129.932,53.583 ; v2(129.932,50.568) v4@129.932,54.975 ; U33.16@130.302,39.878 139.118,48.694 v2(139.118,50.568) 146.225,50.568 146.514,50.857 ; U33.16@130.302,40.378 ccw(c130.302,41.585) 131.156,40.732 ccw(c132.009,39.878) U33.16@130.802,39.878 ; 146.939,51.282 R30.1@147.369,51.282 ; v2(164.75,58.275) 164.75,60.672 168.09,64.012 168.09,64.065 R25.1@170.304,64.065
  Bottom Layer w1.5: 40.183,50.008 ccw(c42.615,47.575) v4(39.175,47.575) 39.175,49 40.825,50.65 v4(45.85,50.65) ; R134.1@49.193,50.65 v4(45.85,50.65) ; v4@72.55,55.975 v4(64.05,55.975) v4(55.1,55.975) 46.475,55.975 45.85,55.35 v4(45.85,50.65) ; 75.185,54.975 cw(c75.185,58.56) v4(72.65,56.025) 73.7,54.975 v4(80.95,54.975) 89.05,54.975 97.125,54.975 105.175,54.975 v4@121.45,54.975 ; U35.16@83.566,39.878 85.672,41.984 D59.2@86.36,41.984 ; 84.829,41.141 cw(c86.26,39.711) D59.2@86.26,41.734 ; 87.843,54.975 ccw(c87.843,56.682) v4(89.05,55.475) ccw(c90.257,56.682) 90.257,54.975 ; 95.858,54.975 ccw(c95.858,56.767) v4(97.125,55.5) ccw(c98.392,56.767) 98.392,54.975 ; P13.7@102.616,37.084 P13.6@105.156,37.084 ; 120.705,54.975 ccw(c120.705,56.17) v4(121.55,55.325) ccw(c122.395,56.17) 122.395,54.975 ; v4@121.55,54.975 v4@129.7,54.975 ; 128.795,54.975 ccw(c128.795,56.255) v4(129.7,55.35) ccw(c130.605,56.255) 130.605,54.975 ; v4@129.932,54.975 146.225,54.975 146.225,50.568 146.225,49.925 146.97,49.18 K5.1@148.845,49.18 150.37,49.18 151.384,48.166 D57.2@151.384,46.048 ; 134.653,54.975 ccw(c134.653,56.597) v4(135.8,55.45) ccw(c136.947,56.597) 136.947,54.975 ; 146.225,49.887 cw(c148.027,49.887) R30.1@147.214,51.495 ; 146.225,53.307 ccw(c149.301,53.307) R30.1@147.126,51.133 ; v4@146.275,54.975 v4@163.725,54.975 ; K5.1@148.845,48.83 cw(c148.845,44.303) 152.046,47.504 ; K5.1@148.976,48.856 cw(c149.724,47.009) 151.132,48.418
  other v2: 95.775,52.675
  other v4: 146.225,55.025 105.175,55.125
_IOIN1: R25.2 U1.4 U33.6 | length 78.9
  Top Layer w0.3: U33.6@117.602,46.898 cw(c117.602,45.449) 118.626,46.474 cw(c119.651,47.498) U33.6@118.202,47.498 ; U33.6@117.602,47.498 119.908,45.192 126.086,45.192 126.596,44.682 131.908,44.682 132.418,45.192 163.386,45.192 170.076,51.882 170.076,58.637 U1.4@173.494,62.055 ; U1.4@172.894,62.055 cw(c171.445,62.055) 172.47,61.031 cw(c173.494,60.006) U1.4@173.494,61.455
  Bottom Layer w0.5: R25.2@172.031,63.815 cw(c172.031,63.211) 172.458,63.638 ; R25.2@172.031,64.065 173.494,62.602 U1.4@173.494,62.055 ccw(c172.173,62.055) 173.107,62.989 ; R25.2@172.254,63.842 cw(c170.466,62.055) U1.4@172.994,62.055
_IOIN2: R26.2 U2.4 U33.5 | length 58.1
  Top Layer w0.3: U33.5@120.142,46.898 cw(c120.142,45.449) 121.166,46.474 cw(c122.191,47.498) U33.5@120.742,47.498 ; U33.5@120.142,47.498 121.894,45.746 126.315,45.746 126.825,45.236 131.678,45.236 132.188,45.746 162.462,45.746 R26.2@167.834,51.118 ; 167.237,50.521 cw(c167.834,49.923) R26.2@167.834,50.768 ; R26.2@167.462,50.747 ccw(c167.185,51.024) R26.2@167.578,51.024
  Top Layer w0.9: R26.2@167.834,51.118 168.922,52.206 U2.4@168.922,52.911 ; R26.2@168.187,51.471 ccw(c167.068,52.589) U2.4@168.626,52.86
_IOIN3: R27.2 U3.4 U33.4 | length 63.3
  Top Layer w0.3: U33.4@122.682,46.898 cw(c122.682,45.449) 123.706,46.474 cw(c124.731,47.498) U33.4@123.282,47.498 ; U33.4@122.682,47.498 123.88,46.3 126.545,46.3 127.055,45.79 131.449,45.79 132.109,46.45 161.775,46.45 164.025,48.7 164.025,50.55 162.65,51.925 162.65,59.101 R27.2@163.645,60.096 ; 163.048,59.499 ccw(c162.45,60.096) R27.2@163.295,60.096 ; R27.2@163.273,59.724 cw(c163.551,59.447) R27.2@163.551,59.84
  Top Layer w0.9: R27.2@163.645,59.973 cw(c166.004,59.973) U3.4@164.537,61.82 ; R27.2@163.645,60.096 163.645,61.35 U3.4@164.35,62.055
_IOIN4: R28.2 U4.4 U33.3 | length 47.4
  Top Layer w0.3: U33.3@125.222,47.498 125.645,47.075 126.553,47.075 ; U33.3@125.512,47.575 ccw(c126.163,47.748) 126.163,47.075 ; U33.3@125.802,47.652 ccw(c126.553,47.852) 126.553,47.075 ; R28.2@154.578,51.992 cw(c154.14,51.554) 154.759,51.554 cw(c155.378,51.554) R28.2@154.94,51.992 ; R28.2@154.759,52.267 154.759,50.159 151.675,47.075 131.95,47.075 131.219,46.344 129.385,46.344 129.148,46.581 129.148,46.843 128.971,47.02 128.916,47.02 128.24,46.344 127.284,46.344 126.553,47.075
  Top Layer w0.5: R28.2@154.759,52.267 154.759,52.434 157.15,54.825 159.25,54.825 159.778,54.297 U4.4@159.778,52.911 ; R28.2@154.915,52.361 cw(c155.47,52.361) R28.2@155.078,52.753 ; U4.4@159.424,53.265 ccw(c158.571,54.118) 159.778,54.118 ccw(c160.985,54.118) U4.4@160.132,53.265
_IOIN5: R29.2 U5.4 U33.14 | length 55.2
  Top Layer w0.3: v2@137.344,52.681 ccw(c136.518,53.507) 137.686,53.507 ; v2(137.45,52.575) 137.686,52.811 137.686,54.711 138.9,55.925 142.7,55.925 145.1,53.525 147.05,53.525 149.45,55.925 150.838,55.925 R29.2@155.009,60.096 ; v2@137.556,52.469 ccw(c137.242,52.783) 137.686,52.783 ; 154.412,59.499 ccw(c153.814,60.096) R29.2@154.659,60.096 ; R29.2@154.637,59.724 cw(c154.915,59.447) R29.2@154.915,59.84
  Top Layer w0.9: R29.2@155.009,59.973 cw(c157.368,59.973) U5.4@155.901,61.82 ; R29.2@155.009,60.096 155.009,61.35 U5.4@155.714,62.055
  Bottom Layer w0.3: 125.499,40.824 ccw(c126.226,40.098) U33.14@125.222,39.878 125.222,40.547 126.275,41.6 ; U33.14@125.515,39.942 cw(c126.862,40.237) 125.887,41.212 ; U33.14@125.808,40.006 cw(c127.499,40.376) 126.275,41.6 ; v2@137.45,52.425 cw(c137.45,52.063) 137.706,52.319 cw(c137.962,52.575) v2@137.6,52.575 ; v2(137.45,52.575) 138.025,52 138.025,50.1 129.525,41.6 126.275,41.6
_IOIN6: R30.2 U6.4 U33.13 | length 54.4
  Top Layer w0.3: v2(137.3,51.4) 138.24,52.34 138.24,54.482 139.108,55.35 142.075,55.35 145.725,51.7 149.931,51.7 U6.4@151.142,52.911 U6.4@151.25,53.019 ; v2@137.3,51.55 ccw(c137.3,51.912) 137.556,51.656 ccw(c137.812,51.4) v2@137.45,51.4 ; U6.4@150.542,52.911 cw(c149.093,52.911) 150.118,51.887 cw(c151.142,50.862) U6.4@151.142,52.311
  Top Layer w0.5: U6.4@150.788,52.557 cw(c149.935,51.704) 151.142,51.704 cw(c152.349,51.704) U6.4@151.496,52.557 ; v2(151.142,50.758) U6.4@151.142,52.911
  Bottom Layer w0.3: U33.13@122.258,40.302 ccw(c121.233,41.327) 122.682,41.327 ccw(c124.131,41.327) U33.13@123.106,40.302 ; U33.13@122.682,39.878 122.682,41.682 123.85,42.85 129.75,42.85 137.3,50.4 v2(137.3,51.4) ; v2@137.194,51.294 cw(c136.938,51.038) 137.3,51.038 cw(c137.662,51.038) v2@137.406,51.294
  Bottom Layer w0.5: R30.2@148.931,51.49 cw(c149.208,50.985) 149.615,51.392 ; R30.2@149.096,51.282 149.725,51.282 150.249,50.758 v2(151.142,50.758) ; R30.2@149.096,51.532 cw(c149.096,50.617) 149.743,51.264 ; R30.2@149.171,51.051 cw(c149.542,50.376) 150.086,50.921
_IOIN7: R31.2 U7.4 U33.12 | length 46.6
  Top Layer w0.3: v2@136.344,52.856 ccw(c136.088,53.112) 136.45,53.112 ccw(c136.812,53.112) v2@136.556,52.856 ; v2(136.45,52.75) 136.45,54.258 138.671,56.479 142.079,56.479 145.696,60.096 ; R31.2@146.091,59.923 ccw(c145.696,59.561) 145.696,60.096 ; R31.2@146.091,60.269 cw(c145.696,60.631) 145.696,60.096 ; R31.2@146.373,60.096 145.696,60.096
  Top Layer w0.9: R31.2@146.373,59.973 cw(c148.732,59.973) U7.4@147.265,61.82 ; R31.2@146.373,60.096 146.373,61.35 U7.4@147.078,62.055
  Bottom Layer w0.3: U33.12@119.718,40.302 ccw(c118.693,41.327) 120.142,41.327 ccw(c121.591,41.327) U33.12@120.566,40.302 ; U33.12@120.142,39.878 120.142,41.717 121.925,43.5 129.458,43.5 136.45,50.492 v2@136.45,52.775 ; v2@136.344,52.644 cw(c136.088,52.388) 136.45,52.388 cw(c136.812,52.388) v2@136.556,52.644
_IOIN8: R32.2 U8.4 U33.11 | length 48.6
  Top Layer w0.3: v2(135.45,50.7) 137.004,50.7 137.008,50.696 137.592,50.696 137.596,50.7 138,50.7 138.8,51.5 138.8,54.258 139.338,54.796 141.375,54.796 142.506,53.665 U8.4@142.506,52.911 ccw(c140.764,52.943) 141.996,54.175 ; v2@135.556,50.594 cw(c135.812,50.338) 135.812,50.7 cw(c135.812,51.062) v2@135.556,50.806 ; 141.497,54.674 cw(c139.785,52.961) U8.4@142.206,52.917 ; 142.495,53.676 cw(c141.744,52.925) U8.4@142.806,52.905
  Top Layer w0.9: R32.2@142.071,50.568 142.506,51.003 U8.4@142.506,52.911 ; R32.2@142.102,50.631 ccw(c141.126,51.607) 142.506,51.607
  Bottom Layer w0.3: U33.11@117.178,40.302 ccw(c116.153,41.327) 117.602,41.327 ccw(c119.051,41.327) U33.11@118.026,40.302 ; U33.11@117.602,39.878 117.602,42.627 119.075,44.1 129.275,44.1 135.45,50.275 v2(135.45,50.7) ; 134.893,49.718 ccw(c133.912,50.7) v2@135.3,50.7 ; v2@135.344,50.594 cw(c135.088,50.338) 135.45,50.338 cw(c135.812,50.338) v2@135.556,50.594 ; 135.406,50.231 ccw(c134.936,50.7) v2@135.6,50.7
_IOIN9: R60.2 U12.4 U34.6 | length 60.8
  Top Layer w0.3: U34.6@94.234,47.498 95.536,48.8 97.182,48.8 97.928,48.054 97.928,46.697 98.6,46.025 99.95,46.025 100.625,46.7 100.625,47.901 103.245,50.521 121.121,50.521 122.4,51.8 122.4,53.55 123.025,54.175 131.816,54.175 R60.2@137.737,60.096 ; U34.6@94.234,48.098 ccw(c94.234,49.547) 95.258,48.522 ccw(c96.283,47.498) U34.6@94.834,47.498 ; 137.14,59.499 ccw(c136.542,60.096) R60.2@137.387,60.096 ; R60.2@137.365,59.724 cw(c137.643,59.447) R60.2@137.643,59.84
  Top Layer w0.9: R60.2@137.737,60.096 137.737,60.842 U12.4@138.95,62.055 ; R60.2@137.787,60.096 cw(c139.709,60.096) 138.35,61.455
_IOIN10: R61.2 U13.4 U34.5 | length 52.3
  Top Layer w0.3: U34.5@96.35,47.074 cw(c95.325,46.049) 96.774,46.049 cw(c98.223,46.049) U34.5@97.198,47.074 ; U34.5@96.774,47.498 96.774,45.701 97.575,44.9 101.975,44.9 103.008,45.933 103.008,47.869 104.089,48.95 125.675,48.95 128.482,51.757 133.224,51.757 U13.4@134.378,52.911 ; U13.4@133.778,52.911 cw(c132.329,52.911) 133.354,51.887 cw(c134.378,50.862) U13.4@134.378,52.311
  Top Layer w0.9: R61.2@133.943,50.568 134.378,51.003 U13.4@134.378,52.911 ; R61.2@133.974,50.631 ccw(c132.998,51.607) 134.378,51.607
_IOIN11: R62.2 U14.4 U34.4 | length 43.4
  Top Layer w0.3: U34.4@99.314,47.498 102.891,51.075 120.242,51.075 121.675,52.508 121.675,53.675 125.975,57.975 127.488,57.975 R62.2@129.609,60.096 ; U34.4@99.314,48.098 ccw(c99.314,49.547) 100.338,48.522 ccw(c101.363,47.498) U34.4@99.914,47.498 ; 129.012,59.499 ccw(c128.414,60.096) R62.2@129.259,60.096 ; R62.2@129.237,59.724 cw(c129.515,59.447) R62.2@129.515,59.84
  Top Layer w0.9: R62.2@129.609,60.096 129.609,60.842 U14.4@130.822,62.055 ; R62.2@129.659,60.096 cw(c131.581,60.096) 130.222,61.455
_IOIN12: R63.2 U15.4 U34.3 | length 29.8
  Top Layer w0.3: U34.3@101.854,47.498 103.981,49.625 124.872,49.625 R63.2@125.815,50.568 ; 125.218,49.971 cw(c125.815,49.373) R63.2@125.815,50.218 ; R63.2@125.443,50.196 ccw(c125.166,50.474) R63.2@125.559,50.474
  Top Layer w0.9: R63.2@125.815,50.568 126.25,51.003 U15.4@126.25,52.911 ; R63.2@125.846,50.631 ccw(c124.87,51.607) 126.25,51.607
_IOIN13: R64.2 U16.4 U34.14 | length 41.5
  Top Layer w0.3: v2@119.744,53.481 ccw(c119.488,53.737) 119.85,53.737 ccw(c120.212,53.737) v2@119.956,53.481 ; v2(119.85,53.375) 119.85,59.425 120.521,60.096 R64.2@121.481,60.096 ; R64.2@121.206,59.915 ccw(c120.768,59.477) 120.768,60.096 ccw(c120.768,60.715) R64.2@121.206,60.277
  Top Layer w0.9: R64.2@121.481,60.096 121.481,60.842 U16.4@122.694,62.055 ; R64.2@121.531,60.096 cw(c123.453,60.096) 122.094,61.455
  Bottom Layer w0.3: U34.14@101.623,40.432 ccw(c101.478,40.779) 101.854,40.779 ; U34.14@101.854,39.878 101.854,40.779 ; U34.14@102.085,40.432 cw(c102.23,40.779) 101.854,40.779 ; v2@119.744,53.269 cw(c119.488,53.013) 119.85,53.013 cw(c120.212,53.013) v2@119.956,53.269 ; v2(119.85,53.375) 119.85,51.05 117.5,48.7 112.092,48.7 110.5,47.108 110.5,45.225 107.892,42.617 103.692,42.617 101.854,40.779
_IOIN14: R58.2 U10.4 U34.13 | length 34.5
  Bottom Layer w0.3: U34.13@99.614,39.878 cw(c101.994,39.878) 100.311,41.561 ; 99.799,41.049 ccw(c100.97,39.878) U34.13@99.314,39.878 99.314,40.564 101.921,43.171 107.446,43.171 109.796,45.521 109.796,47.596 111.575,49.375 116.38,49.375 R58.2@117.687,50.682 ; U34.13@99.914,39.878 cw(c103.019,39.878) 100.823,42.073 ; 117.09,50.085 cw(c117.687,49.487) R58.2@117.687,50.332 ; R58.2@117.315,50.31 ccw(c117.038,50.588) R58.2@117.431,50.588
  Bottom Layer w0.9: R58.2@117.687,50.682 118.122,51.117 U10.4@118.122,52.911 ; R58.2@117.718,50.745 ccw(c116.742,51.721) 118.122,51.721
_IOIN15: R57.2 U9.4 U34.12 | length 40.4
  Top Layer w0.3: v2@111.594,53.431 ccw(c111.338,53.687) 111.7,53.687 ccw(c112.062,53.687) v2@111.806,53.431 ; v2(111.7,53.325) 111.7,59.125 112.671,60.096 ; R57.2@113.072,59.921 ccw(c112.671,59.549) 112.671,60.096 ; R57.2@113.072,60.271 cw(c112.671,60.643) 112.671,60.096 ; R57.2@113.353,60.096 112.671,60.096
  Top Layer w0.9: R57.2@113.353,60.096 113.353,60.842 U9.4@114.566,62.055 ; R57.2@113.403,60.096 cw(c115.325,60.096) 113.966,61.455
  Bottom Layer w0.3: U34.12@96.774,39.878 96.774,39.974 100.525,43.725 107.217,43.725 109.242,45.75 109.242,48.267 111.7,50.725 v2(111.7,53.325) ; U34.12@96.774,40.478 ccw(c96.774,41.695) 97.634,40.834 ; U34.12@97.074,39.878 cw(c98.03,39.878) 97.354,40.554 ; U34.12@97.374,39.878 cw(c99.054,39.878) 97.866,41.066 ; v2@111.594,53.219 cw(c111.338,52.963) 111.7,52.963 cw(c112.062,52.963) v2@111.806,53.219
_IOIN16: R59.2 U11.4 U34.11 | length 28.7
  Bottom Layer w0.3: U34.11@94.234,39.878 98.635,44.279 106.804,44.279 108.5,45.975 108.5,48.375 109.547,49.422 R59.2@109.547,50.857 ; U34.11@94.234,40.478 ccw(c94.234,41.927) 95.258,40.902 ccw(c96.283,39.878) U34.11@94.834,39.878 ; R59.2@109.366,50.582 cw(c108.928,50.144) 109.547,50.144 cw(c110.166,50.144) R59.2@109.728,50.582
  Bottom Layer w0.9: R59.2@109.547,50.857 109.994,51.304 U11.4@109.994,52.911 ; R59.2@109.578,50.92 ccw(c108.573,51.924) 109.994,51.924
_IOIN17: R93.2 U21.4 U35.6 | length 54.1
  Top Layer w0.3: U35.6@70.479,47.956 ccw(c69.773,48.791) 70.866,48.791 ; U35.6@70.866,47.498 70.866,48.791 ; U35.6@71.253,47.956 cw(c71.959,48.791) 70.866,48.791 ; 104.628,59.499 ccw(c104.03,60.096) R93.2@104.875,60.096 ; R93.2@104.853,59.724 cw(c105.131,59.447) R93.2@105.131,59.84 ; R93.2@105.225,60.096 99.329,54.2 90.475,54.2 89.904,53.629 89.904,51.154 88.854,50.104 78.904,50.104 77.3,48.5 77.3,46.8 76.45,45.95 75.275,45.95 74.56,46.665 74.56,48.99 73.8,49.75 71.825,49.75 70.866,48.791
  Top Layer w0.9: R93.2@105.225,60.096 105.225,60.842 U21.4@106.438,62.055 ; R93.2@105.275,60.096 cw(c107.197,60.096) 105.838,61.455
_IOIN18: R90.2 U18.4 U35.5 | length 47.7
  Top Layer w0.3: U35.5@72.982,47.074 cw(c71.957,46.049) 73.406,46.049 cw(c74.855,46.049) U35.5@73.83,47.074 ; U35.5@73.406,47.498 73.406,45.519 73.925,45 78,45 79.825,46.825 79.825,48.05 80.625,48.85 90.575,48.85 91.6,49.875 100.325,49.875 101.866,51.416 U18.4@101.866,52.911 ; U18.4@101.442,52.487 cw(c100.417,51.462) 101.866,51.462 cw(c103.315,51.462) U18.4@102.29,52.487
  Top Layer w0.5: R90.2@96.971,50.981 99.936,50.981 U18.4@101.866,52.911 ; U18.4@101.366,52.911 cw(c100.159,52.911) 101.012,52.057 cw(c101.866,51.204) U18.4@101.866,52.411
_IOIN19: R94.2 U22.4 U35.4 | length 35.9
  Top Layer w0.3: U35.4@75.522,47.922 ccw(c74.497,48.947) 75.946,48.947 ccw(c77.395,48.947) U35.4@76.37,47.922 ; U35.4@75.946,47.498 75.946,49.046 77.725,50.825 88.6,50.825 89.35,51.575 89.35,53.975 91.125,55.75 92.751,55.75 R94.2@97.097,60.096 ; 96.5,59.499 ccw(c95.902,60.096) R94.2@96.747,60.096 ; R94.2@96.725,59.724 cw(c97.003,59.447) R94.2@97.003,59.84
  Top Layer w0.9: R94.2@97.097,60.096 97.097,60.842 U22.4@98.31,62.055 ; R94.2@97.147,60.096 cw(c99.069,60.096) 97.71,61.455